# Altium PCB FelineFeastPCB.PcbDoc (part 1 of 2)
Units mm, origin at the board's own origin, x right, y up, seen from the top; angles counter-clockwise.
Board outline 55 x 55 mm, 2 copper layers (Top Layer, Bottom Layer); 81 components, 60 nets, 299 pads, 12 vias.
Unrouted connection lines stored in the file: 202.
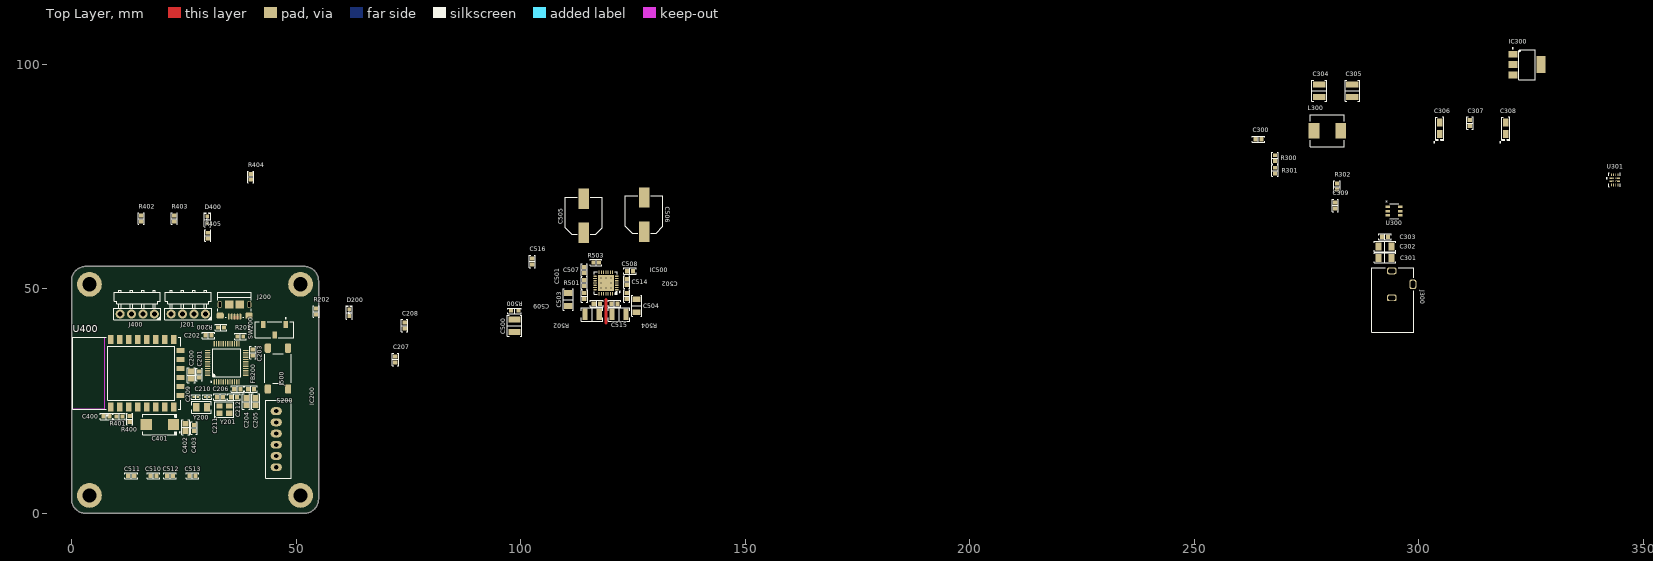
[diagram p0: Top Layer view]
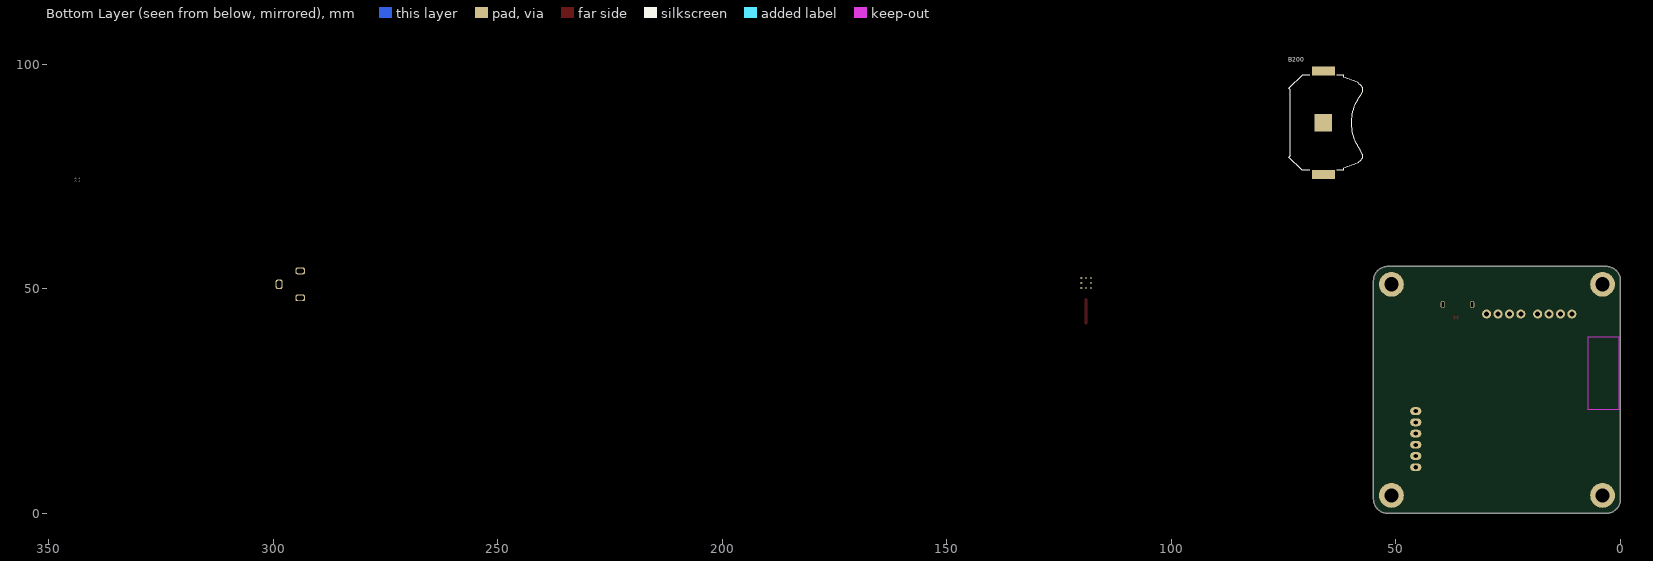
[diagram p1: Bottom Layer view, seen from below]

## Layer stack, top to bottom
Top Solder: solder mask 0.0102, Solder Resist, Dk 3.5
Top Layer: signal copper 0.0356
Dielectric 1: dielectric 0.32, FR-4, Dk 4.8
Bottom Layer: signal copper 0.0356
Bottom Solder: solder mask 0.0102, Solder Resist, Dk 3.5

## Board outline
0,3.2 0,51.8 cw(c3.2,51.8) 3.2,55 51.8,55 cw(c51.8,51.8) 55,51.8 55,3.2 cw(c51.8,3.2) 51.8,0 3.2,0 cw(c3.2,3.2)

## Design rules (kind name [scope] priority, off if disabled: settings)
Clearance [All] p1: gap=0.1 ignorepadtopadclearanceinfootprint=FALSE except(0.2: Arc-Via Track-Via; 0.35: Arc-THPad Track-THPad)
DiffPairsRouting [All] p1: maxlimit=0.254 minlimit=0.254 mostfreqgap=0.254 toplayer_minwidth=0.381 toplayer_maxwidth=0.381 toplayer_prefwidth=0.381 bottomlayer_minwidth=0.381 bottomlayer_maxwidth=0.381 bottomlayer_prefwidth=0.381 maxuncoupledlength=12.7
HoleToHoleClearance [All] p1: gap=0.2 allowstackedmicrovias=TRUE
MinimumSolderMaskSliver [All] p1: minsoldermaskwidth=0.2
PolygonConnect [All] p1: connectstyle=Relief reliefconductorwidth=0.254 reliefentries=4 polygonreliefangle="90 Angle" airgapwidth=0.254
RoutingVias [All] p1: holewidth=0.711 width=1.27 viastyle="Through Hole" minholewidth=0.15 minwidth=0.25 maxholewidth=1.5 maxwidth=3
SilkToSilkClearance [All] p1: silktosilkclearance=0.1
SilkToSolderMaskClearance [IsPad] p1: minsilkscreentomaskgap=0.1 clearancetoexposedcopper=TRUE
SolderMaskExpansion [All] p1: expansion=0 istentingtop=FALSE
SupplyNets "Schematic Supply Nets_6" [InNet('+3.3V')] p1: voltage=0.000
SupplyNets "Schematic Supply Nets_5" [InNet('+24V')] p2: voltage=0.000
SupplyNets "Schematic Supply Nets_4" [InNet('VBUS')] p3: voltage=0.000
SupplyNets "Schematic Supply Nets_3" [InNet('+3.3VA')] p4: voltage=0.000
SupplyNets "Schematic Supply Nets_2" [InNet('+VBAT')] p5: voltage=0.000
SupplyNets "Schematic Supply Nets_1" [InNet('+5V')] p6: voltage=0.000
SupplyNets "Schematic Supply Nets" [InNet('GND')] p7: voltage=0.000
Width [All] p1: maxlimit=3 minlimit=0.1 preferedwidth=0.254
25 further rules are at their usual default settings.

## Classes and differential pairs
component class U_5_StepperMotorDriver: C500 C501 C502 C503 C504 C505 C506 C507 C508 C509 C510 C511 C512 C513 C514 C515 C516 IC500 J500 R500 R501 R502 R503 R504
component class U_4_WiFi: C400 C401 C402 C403 D400 J400 R400 R401 R402 R403 R404 R405 U400
component class U_3_Power: C300 C301 C302 C303 C304 C305 C306 C307 C308 C309 IC300 J300 L300 R300 R301 R302 U300 U301
component class U_2_MCU: B200 C200 C201 C202 C203 C204 C205 C206 C207 C208 C209 C210 C211 C212 D200 FB200 IC200 J200 J201 R200 R201 R202 S200 SW200 Y200 Y201
differential pair USB: +USB_P -USB_N

## Components (designator, comment, footprint, x,y, rotation, side; value= is the part's Value field where it differs from the comment)
B200 "3034TR" "KEYSTONE 3034TR" 66.167,86.995 r270 bottom
C200 "10 µF" "CAP 0805_2012" 26.67,30.772 r90 top
C201 "0.1 µF" "CAP 0603_1608" 28.448,30.901 r270 top
C202 "0.1 µF" "CAP 0603_1608" 30.48,39.624 r180 top
C203 "0.1 µF" "CAP 0603_1608" 40.386,35.814 r90 top
C204 "1 µF" "CAP 0805_2012" 38.949,24.892 r90 top
C205 "1 µF" "CAP 0805_2012" 40.981,24.892 r90 top
C206 "10000 pF" "CAP 0603_1608" 36.917,27.686 r0 top
C207 "0.1 µF" "CAP 0603_1608" 72.136,34.29 r90 top
C208 "0.1 µF" "CAP 0603_1608" 74.168,41.822 r90 top
C209 "4.7 pF" "MURATA GJM155 0402_1005" 27.686,25.908 r0 top
C210 "4.7 pF" "MURATA GJM155 0402_1005" 30.226,25.908 r180 top
C211 "8.2 pF" "CAP 0603_1608" 33.107,25.908 r180 top
C212 "8.2 pF" "CAP 0603_1608" 36.155,25.908 r0 top
C300 "0.1 µF" "CAP 0603_1608" 264.287,83.312 r0 top
C301 "4.7 µF" "CAP 1206_3216 - 0.8MM" 292.481,56.896 r0 top
C302 "4.7 µF" "CAP 1206_3216 - 0.8MM" 292.481,59.436 r0 top
C303 "0.1 µF" "CAP 0603_1608" 292.481,61.595 r0 top
C304 "22 µF" "CAP 1210_3225 - 1MM" 277.84,94.107 r90 top
C305 "22 µF" "CAP 1210_3225 - 1MM" 285.206,94.107 r90 top
C306 "10µF" "CAP POL 1206_3216" 304.654,85.779 r90 top
C307 "0.1 µF" "CAP 0603_1608" 311.385,86.922 r90 top
C308 "10µF" "CAP POL 1206_3216" 319.386,85.779 r90 top
C309 "10000 pF" "CAP 0603_1608" 281.432,68.58 r90 top
C400 "470 pF" "CAP 0603_1608" 7.747,21.59 r0 top
C401 "100µF" "CAP POL 2917_7343" 19.685,19.812 r180 top
C402 "10 µF" "CAP 0805_2012" 25.4,19.177 r270 top
C403 "0.1 µF" "CAP 0603_1608" 27.305,19.05 r90 top
C500 "1 µF" "CAP 1210_3225 - 1MM" 98.679,41.78 r270 top
C501 "0.1 µF" "CAP 0603_1608" 114.226,48.387 r270 top
C502 "0.1 µF" "CAP 0603_1608" 123.645,48.387 r270 top
C503 "10 µF" "CAP 1206_3216 - 0.8MM" 110.617,47.625 r90 top
C504 "10 µF" "CAP 1206_3216 - 0.8MM" 125.857,46.228 r90 top
C505 "220 µF" "CAP ALSMD 8.3MM H10.5MM" 114.046,66.294 r90 top
C506 "220 µF" "CAP ALSMD 8.3MM H10.5MM" 127.508,66.548 r90 top
C507 "0.1 µF" "CAP 0603_1608" 114.173,54.229 r270 top
C508 "0.1 µF" "CAP 0603_1608" 124.345,53.975 r180 top
C509 "0.1 µF" "CAP 0603_1608" 116.967,46.736 r180 top
C510 "470 pF" "CAP 0603_1608" 18.248,8.374 r0 top
C511 "470 pF" "CAP 0603_1608" 13.295,8.374 r0 top
C512 "470 pF" "CAP 0603_1608" 21.971,8.374 r180 top
C513 "470 pF" "CAP 0603_1608" 26.924,8.374 r180 top
C514 "0.022 µF" "CAP 0603_1608" 123.645,51.562 r90 top
C515 "0.1 µF" "CAP 0603_1608" 120.904,46.736 r0 top
C516 "2.2 µF" "CAP 0603_1608" 102.616,56.134 r270 top
D200 "Yellow" "LED 0603_1608 YELLOW" 61.849,44.704 r90 top
D400 "Yellow" "LED 0603_1608 YELLOW" 30.251,65.405 r90 top
FB200 "120 Ohms @ 100 MHz" "FER 0603_1608" 39.965,27.686 r0 top
IC200 "STM32F103CBT6" "ST LQFP-48 7X7MM" 34.544,33.528 r90 top
IC300 "LD1117S33TR" "ST SOT-223" 324.104,99.949 r0 top
IC500 "TMC2209-LA-T" "TRINAMIC QFN28 TMC2209-LA" 118.999,51.308 r180 top
J200 "10118193-0001LF" "FCI USB 10118193-0001LF" 36.3,46.45 r0 top
J201 "M20-9960445" "HARWIN M20-9960445" 26,44.4 r180 top
J300 "PJ-102AH" "CUI PJ-102AH" 294.005,47.498 r180 top
J400 "M20-9960445" "HARWIN M20-9960445" 14.63,44.4 r180 top
J500 "B6B-XH-A(LF)(SN)" "JST XH B6B-XH-A" 45.593,16.53 r90 top
L300 "SL0624-6R8M" SL0624-6R8M 279.654,85.217 r0 top
R200 "1.5 kOhms" "RES 0603_1608" 33.274,41.402 r180 top
R201 "10 kOhms" "RES 0603_1608" 37.592,39.37 r180 top
R202 "820 Ohms" "RES 0603_1608" 54.483,44.958 r90 top
R300 "100 kOhms" "RES 0603_1608" 267.97,79.121 r90 top
R301 "13.7 kOhms" "RES 0603_1608" 267.97,76.327 r90 top
R302 "51.1 kOhms" "RES 0603_1608" 281.813,72.786 r90 top
R400 "10 kOhms" "RES 0603_1608" 12.954,21.02 r270 top
R401 "10 kOhms" "RES 0603_1608" 10.668,21.59 r180 top
R402 "10 kOhms" "RES 0603_1608" 15.519,65.659 r90 top
R403 "10 kOhms" "RES 0603_1608" 22.885,65.659 r90 top
R404 "10 kOhms" "RES 0603_1608" 39.903,74.93 r90 top
R405 "820 Ohms" "RES 0603_1608" 30.353,61.849 r90 top
R500 "1.1 Ohms" "YAGEO RES 0603_1608" 98.679,45.085 r0 top
R501 "100 kOhms" "RES 0603_1608" 114.173,51.308 r90 top
R502 "110 mOhms" "RES 1210_3225" 115.951,44.323 r0 top
R503 "1 kOhms" "RES 0603_1608" 116.837,55.88 r0 top
R504 "110 mOhms" "RES 1210_3225" 121.92,44.323 r180 top
S200 "FSM6JSMA" "TE FSM6JSMA" 45.974,32.258 r0 top
SW200 "JS102011JCQN" FP-JS102011JCQN-MFG 45.212,40.894 r180 top
U300 "LMR51430XDDCR" SOT-23-THIN-6_DDC_TEX 294.513,67.31 r0 top
U301 "TPS2121RUXT" FP-RUX0012A-MFG 343.626,74.295 r0 top
U400 "ESP8266-12E/ESP-12E" XCVR_ESP8266-12E/ESP-12E 15.775,31.242 r90 top
Y200 "32.768 kHz" "ABRACON ABS07" 28.956,23.622 r0 top
Y201 "16 MHz" "NDK NX3225GA" 34.036,23.114 r0 top

## Footprints (in the part's own frame and the unit in brackets; to place one, negate y for a bottom-side part, rotate by r counter-clockwise, add the part's x,y. Pads: shape width x height; smd on the part's side, far side on the other; paste and mask are expansions set on the pad)
"ABRACON ABS07" [mm] "Crystal, 2-Leads, Body 3.20x1.50mm, IPC Medium Density"
  rect 1.4x1.9 smd: 1(-1.2,0) 2(1.2,0)
  silkscreen extent -2.2,-1.3 2.2,1.3, body extent -1.62,-0.77 1.63,0.78, height 0.9
"CAP 0603_1608" [mm] "Chip Capacitor, 2-Leads, Body 1.60x0.80mm, IPC Medium Density"
  rect 0.9x1 smd: 1(-0.675,0) 2(0.675,0)
  silkscreen extent -1.4,-0.7 1.4,0.7, body extent -0.8,-0.41 0.8,0.41, height 0.82
"CAP 0805_2012" [mm] "Chip Capacitor, 2-Leads, Body 2.00x1.20mm, IPC Medium Density"
  rect 1.3x1.4 smd: 1(-0.8,0) 2(0.8,0)
  silkscreen extent -1.7,-0.9 1.7,0.9, body extent -1,-0.64 1,0.64, height 1.26
"CAP 1206_3216 - 0.8MM" [mm] "Chip Capacitor, 2-Leads, Body 3.25x1.60mm, IPC Medium Density"
  rect 1.3x1.8 smd: 1(-1.45,0) 2(1.45,0)
  silkscreen extent -2.37,-1.12 2.37,1.12, body extent -1.6,-0.8 1.6,0.8, height 0.8
"CAP 1210_3225 - 1MM" [mm] "Chip Capacitor, 2-Leads, Body 3.20x2.50mm, IPC Medium Density"
  rect 1.3x2.7 smd: 1(-1.4,0) 2(1.4,0)
  silkscreen extent -2.37,-1.63 2.37,1.63, body extent -1.6,-1.25 1.6,1.25, height 1
"CAP ALSMD 8.3MM H10.5MM" [mm] "Aluminum Electrolytic Capacitor, Body 8.30x8.30x10.50mm, IPC Low Density"
  rect 4.55x2.3 smd: 1(-3.8,0) 2(3.8,0)
  silkscreen extent -4.15,-4.15 4.15,4.15, body extent -4.95,-4.15 4.95,4.15, height 10.5
"CAP POL 1206_3216" [mm] "Molded Capacitor, 2-Leads, Body 3.20x1.6mm, IPC Medium Density"
  rect 1.8x1.23 smd: 1(-1.31,0) 2(1.31,0)
  silkscreen extent -3.22,-0.9 2.5,1.32, body extent -1.72,-0.85 1.71,0.85, height 1.7
"CAP POL 2917_7343" [mm] "Molded Capacitor, 2-Leads, Body 7.30x4.30mm, IPC Medium Density"
  rect 2.55x2.45 smd: 1(-3.025,0) 2(3.025,0)
  silkscreen extent -4.58,-2.3 3.8,2.3, body extent -3.65,-2.15 3.65,2.15, height 4.1
"CUI PJ-102AH" [mm] "DC Barrel Jack W/ Switch 2.0x5.5"
  rrect50% 2.1x1.5 hole 1 slot 1.6 at 0 deg: 1(0,-6.5) 2(0,-0.5)
  rrect50% 1.5x2.1 hole 1 slot 1.6 at 90 deg: 3(-4.7,-3.5)
  silkscreen extent -4.92,-7.2 4.47,7.2, body extent -4.92,-7.2 4.47,7.2, height 11
"FCI USB 10118193-0001LF" [mm] "USB 2.0 Type B Micro"
  oval 0.4x1.35 smd: 1(1.3,-2.625) 2(0.65,-2.625) 3(0,-2.625) 4(-0.65,-2.625) 5(-1.3,-2.625)
  oval 0.9x1.6 hole 0.5 slot 1.2 at 90 deg: S(-3.3,0.05) S(3.3,0.05)
  rrect50% 1.6x1.4 smd: S(-3.2,-2.4) S(3.2,-2.4)
  rect 1.9x1.8 smd: S(-1.2,0.05) S(1.2,0.05)
  silkscreen extent -3.7,-2.8 3.7,2.8, body extent -3.93,-2.9 3.93,2.76, height 2.78
"FER 0603_1608" [mm] "Chip Ferrite, 2-Leads, Body 1.60x0.80mm, IPC Medium Density"
  rect 0.9x1 smd: 1(-0.675,0) 2(0.675,0)
  silkscreen extent -1.4,-0.7 1.4,0.7, body extent -0.8,-0.41 0.8,0.41, height 0.82
FP-JS102011JCQN-MFG [mm]
  rect 1x1.6 smd paste+0 mask+0: 1(-2.5,-1.2) 2(0,1.2) 3(2.5,-1.2)
  silkscreen extent -4.25,-2.67 4.25,1.8, body extent -4.35,-2.1 4.35,2.1, height 0.25
FP-RUX0012A-MFG [mm]
  rrect25% 1.05x0.4 smd paste+0 mask+0: 1(-0.675,0.35) 2(-0.675,-0.35) 7(0.675,-0.35) 8(0.675,0.35)
  rrect50% 0.2x0.6 smd paste+0 mask+0: 3(-0.75,-1.15) 4(-0.25,-1.15) 5(0.25,-1.15) 6(0.75,-1.15) 9(0.75,1.15) 10(0.25,1.15) 11(-0.25,1.15) 12(-0.75,1.15)
  silkscreen extent -1.87,-1.55 1.3,1.55, body extent -1.3,-1.55 1.3,1.55, height 0.25
"HARWIN M20-9960445" [mm] "2.54mm DIL PC TAIL PIN HEADER ASSEMBLY"
  round 2 hole 1.1: 1(-3.81,0) 2(-1.27,0) 3(1.27,0) 4(3.81,0)
  silkscreen extent -5.24,-5.33 5.24,1.3, body extent -5.08,-10.9 5.08,0.32, height 2.54
"JST XH B6B-XH-A" [mm]
  oval 1.75x2.5 hole 0.9: 1(-6.25,0) 2(-3.75,0) 3(-1.25,0) 4(1.25,0) 5(3.75,0) 6(6.25,0)
  silkscreen extent -8.7,-3.38 8.7,2.38, body extent -8.7,-3.38 8.7,2.38, height 7
"KEYSTONE 3034TR" [mm] "Battery Retainer Coin, 20.0mm 1 Cell SMD (SMT) Tab"
  rect 2x5.08 smd: 1(-11.5,0) 1(11.5,0)
  rect 3.96x3.96 smd: 2(0,0)
  silkscreen extent -10.6,-7.7 10.6,8.71, body extent -11.62,-7.74 11.62,8.73, height 4.06
"LED 0603_1608 YELLOW" [mm] "Chip Diode, 2-Leads, Body 1.60x0.80mm, IPC Medium Density"
  rect 0.8x0.8 smd: 1(-0.75,0) 2(0.75,0)
  silkscreen extent -1.52,-0.7 1.52,0.7, body extent -0.8,-0.4 0.8,0.4, height 0.53
"MURATA GJM155 0402_1005" [mm] "Chip Capacitor, 2-Leads, Body 1.0x0.50mm"
  rect 0.55x0.5 smd: 1(-0.475,0) 2(0.475,0)
  silkscreen extent -1,-0.5 1,0.5, body extent -0.52,-0.27 0.53,0.28, height 0.55
"NDK NX3225GA" [mm] "Crystal, 4-Leads, Body 2.50x3.20mm, Pitch 2.20mm, IPC Medium Density"
  rect 1.4x1.2 smd: 1(-1.1,-0.8) 2(1.1,-0.8) 3(1.1,0.8) 4(-1.1,0.8)
  silkscreen extent -2.25,-1.85 2.1,1.7, body extent -1.61,-1.26 1.61,1.26, height 0.75
"RES 0603_1608" [mm] "Chip Resistor, 2-Leads, Body 1.60x0.80mm, IPC Medium Density"
  rect 0.85x0.95 smd: 1(-0.65,0) 2(0.65,0)
  silkscreen extent -1.27,-0.7 1.27,0.7, body extent -0.8,-0.4 0.8,0.4, height 0.45
"RES 1210_3225" [mm] "Chip Resistor, 2-Leads, Body 3.1x2.6mm, IPC Medium Density"
  rect 1.15x2.5 smd: 1(-1.575,0) 2(1.575,0)
  silkscreen extent -2.4,-1.5 2.4,1.5, body extent -1.6,-1.25 1.6,1.25, height 0.7
SL0624-6R8M [mm] "Precision Wire Wound Inductor, 2-Leads, Body 7,10x6,60mm, IPC Medium Density"
  rect 2.4x3.5 smd: 1(-3,0) 2(3,0)
  silkscreen extent -3.8,-3.55 3.8,3.55, body extent -3.8,-3.55 3.8,3.55, height 2.4
SOT-23-THIN-6_DDC_TEX [mm]
  rect 0.998x0.558 smd paste+0 mask+0: 1(-1.375,0.95) 2(-1.375,0) 3(-1.375,-0.95) 4(1.375,-0.95) 5(1.375,0) 6(1.375,0.95)
  silkscreen extent -1,-1.65 1,1.65, body extent -1.52,-1.52 1.52,1.52, height 1.09
"ST LQFP-48 7X7MM" [mm] "LQFP, 48-Leads, Body 7.00x7.00mm, Pitch 0.50mm, IPC Medium Density"
  oval 1.2x0.3 smd: 1(-4.25,2.75) 2(-4.25,2.25) 3(-4.25,1.75) 4(-4.25,1.25) 5(-4.25,0.75) 6(-4.25,0.25) 7(-4.25,-0.25) 8(-4.25,-0.75) 9(-4.25,-1.25) 10(-4.25,-1.75) 11(-4.25,-2.25) 12(-4.25,-2.75) 25(4.25,-2.75) 26(4.25,-2.25) 27(4.25,-1.75) 28(4.25,-1.25) 29(4.25,-0.75) 30(4.25,-0.25) 31(4.25,0.25) 32(4.25,0.75) 33(4.25,1.25) 34(4.25,1.75) 35(4.25,2.25) 36(4.25,2.75)
  oval 0.3x1.2 smd: 13(-2.75,-4.25) 14(-2.25,-4.25) 15(-1.75,-4.25) 16(-1.25,-4.25) 17(-0.75,-4.25) 18(-0.25,-4.25) 19(0.25,-4.25) 20(0.75,-4.25) 21(1.25,-4.25) 22(1.75,-4.25) 23(2.25,-4.25) 24(2.75,-4.25) 37(2.75,4.25) 38(2.25,4.25) 39(1.75,4.25) 40(1.25,4.25) 41(0.75,4.25) 42(0.25,4.25) 43(-0.25,4.25) 44(-0.75,4.25) 45(-1.25,4.25) 46(-1.75,4.25) 47(-2.25,4.25) 48(-2.75,4.25)
  silkscreen extent -4.37,-3.1 3.1,3.57, body extent -4.51,-4.51 4.51,4.51, height 1.55
"ST SOT-223" [mm] "SOT223, 4-Leads, Body 6.50x7.00mm (avg), Pitch 2.30mm, IPC Medium Density"
  rect 2x1.5 smd: 1(-3.15,2.3) 2(-3.15,0) 3(-3.15,-2.3)
  rect 2x3.8 smd: 4(3.15,0)
  silkscreen extent -3.27,-3.35 1.85,3.72, body extent -3.52,-3.25 3.5,3.25, height 1.8
"TE FSM6JSMA" [mm]
  rrect50% 1.4x2.1 smd: 1(2.25,4.55) 2(2.25,-4.55) 3(-2.25,4.55) 4(-2.25,-4.55)
  silkscreen extent -2.92,-3.3 2.92,3.3, body extent -3,-5 3,5, height 7.11
"TRINAMIC QFN28 TMC2209-LA" [mm] "QFN, 28-Leads, Body 5.00x5.00mm, Pitch 0.50mm, Thermal Pad 3.70x3.70mm, IPC Medium Density"
  oval 0.8x0.25 smd: 1(-2.425,1.5) 2(-2.425,1) 3(-2.425,0.5) 4(-2.425,0) 5(-2.425,-0.5) 6(-2.425,-1) 7(-2.425,-1.5) 15(2.425,-1.5) 16(2.425,-1) 17(2.425,-0.5) 18(2.425,0) 19(2.425,0.5) 20(2.425,1) 21(2.425,1.5)
  oval 0.25x0.8 smd: 8(-1.5,-2.425) 9(-1,-2.425) 10(-0.5,-2.425) 11(0,-2.425) 12(0.5,-2.425) 13(1,-2.425) 14(1.5,-2.425) 22(1.5,2.425) 23(1,2.425) 24(0.5,2.425) 25(0,2.425) 26(-0.5,2.425) 27(-1,2.425) 28(-1.5,2.425)
  rect 3.6x3.6 smd paste-2 mask+0.102: 29(0,0)
  silkscreen extent -3.22,-2.55 2.55,2.55, body extent -2.5,-2.5 2.5,2.5, height 0.9
XCVR_ESP8266-12E/ESP-12E [mm]
  rect 2x1.2 smd: 1(-7.5,7) 2(-7.5,5) 3(-7.5,3) 4(-7.5,1) 5(-7.5,-1) 6(-7.5,-3) 7(-7.5,-5) 8(-7.5,-7) 15(7.5,-7) 16(7.5,-5) 17(7.5,-3) 18(7.5,-1) 19(7.5,1) 20(7.5,3) 21(7.5,5) 22(7.5,7)
  rect 1.1x1.7 smd: 9(-5,-8.5) 10(-3,-8.5) 11(-1,-8.5) 12(1,-8.5) 13(3,-8.5) 14(5,-8.5)
  Keep-Out Layer region: 8,8.51 -8.009,8.51 -8.009,15.5 8,15.5
  Keep-Out Layer region: 8,8.51 -8.009,8.51 -8.009,15.5 8,15.5
  silkscreen extent -9.5,-8.5 8,15.5, body extent -8,-8.49 8,15.51, height 3
"YAGEO RES 0603_1608" [mm] "Chip Resistor, 2-Leads, Body 1.60x0.80mm"
  rect 0.9x0.8 smd: 1(-0.85,0) 2(0.85,0)
  silkscreen extent -1.5,-0.6 1.5,0.6, body extent -0.8,-0.4 0.8,0.4, height 0.45

## Part data
B200: "BATTERY RETAINER COIN 20MM SMD", Manufacturer="Keystone Electronics", Supplier Part Number 1=36-3034CT-ND, Battery Cell Size="Coin, 20.0mm", Battery Series="2020, 2025, 2032", Battery Type, Function="Coin Cell, Retainer", ComponentLink1Description=Datasheet, ComponentLink1URL=http://keyelco.com/userAssets/file/M65p9.pdf, ComponentLink2Description="DigiKey Link", ComponentLink2URL=https://www.digikey.com/en/products/detail/keystone-electronics/3034TR/4499408, Height Above Board="0.160\" (4.06mm)", LastUpdated="29.08.2025 3:23:39", Lifecycle Status=Active, Minimum Order=1, Mounting Type="PCB, Surface Mount", Number of Cells=1, Packaging=TapeAndReel, Part Number=3034TR, Part Status=Active, PartId=8, Price=0.20, Series=-, Style=Retainer, Supplier 1=DigiKey, Termination Style="SMD (SMT) Tab"
C200 C402: library part CL21B106KPQNNNE, "CAP CER 10UF 10V X7R 0805", Device Package="0805 (2012 Metric)", Manufacturer="Samsung Electro-Mechanics", Operating Temperature="-55°C ~ 125°C", Supplier Part Number 1=1276-1764-1-ND, Temperature Coefficient=X7R, Tolerance=±10%, Voltage - Rated=10V, Applications="General Purpose", Capacitance="10 µF", ComponentLink1Description=Datasheet, ComponentLink1URL=http://www.samsungsem.com/kr/support/product-search/mlcc/CL21B106KPQNNNE.jsp, ComponentLink2Description="DigiKey Link", ComponentLink2URL=https://www.digikey.com/en/products/detail/samsung-electro-mechanics/CL21B106KPQNNNE/3887422, LastUpdated="09.02.2024 20:15:41", Lifecycle Status=Active, Minimum Order=1, Mounting Type="Surface Mount, MLCC", Package / Case="0805 (2012 Metric)", Packaging=TapeAndReel, Part Number=CL21B106KPQNNNE, Part Status=Active, PartId=13130, Price=0.02, Series=CL, Size / Dimension="0.079\" L x 0.049\" W (2.00mm x 1.25mm)", Supplier 1=DigiKey, Thickness (Max)="0.055\" (1.40mm)"
C201 C202 C203 C207 C208 C300 C307 C403: library part CL10B104KA8NNNC, "CAP CER 0.1UF 25V X7R 0603", Device Package="0603 (1608 Metric)", Manufacturer="Samsung Electro-Mechanics", Operating Temperature="-55°C ~ 125°C", Supplier Part Number 1=1276-1006-1-ND, Temperature Coefficient=X7R, Tolerance=±10%, Voltage - Rated=25V, Applications="General Purpose", Capacitance="0.1 µF", ComponentLink1Description=Datasheet, ComponentLink1URL=http://www.samsungsem.com/kr/support/product-search/mlcc/CL10B104KA8NNNC.jsp, ComponentLink2Description="DigiKey Link", ComponentLink2URL=https://www.digikey.com/en/products/detail/samsung-electro-mechanics/CL10B104KA8NNNC/3886664, LastUpdated="09.02.2024 20:10:20", Lifecycle Status=Active, Minimum Order=1, Mounting Type="Surface Mount, MLCC", Package / Case="0603 (1608 Metric)", Packaging=TapeAndReel, Part Number=CL10B104KA8NNNC, Part Status=Active, PartId=9793, Price=0.01, Series=CL, Size / Dimension="0.063\" L x 0.031\" W (1.60mm x 0.80mm)", Supplier 1=DigiKey, Thickness (Max)="0.035\" (0.90mm)"
C204 C205: library part CL21B105KAFNFNE, "CAP CER 1UF 25V X7R 0805", Device Package="0805 (2012 Metric)", Manufacturer="Samsung Electro-Mechanics", Operating Temperature="-55°C ~ 125°C", Supplier Part Number 1=1276-2926-1-ND, Temperature Coefficient=X7R, Tolerance=±10%, Voltage - Rated=25V, Applications="General Purpose", Capacitance="1 µF", ComponentLink1Description=Datasheet, ComponentLink1URL=http://www.samsungsem.com/kr/support/product-search/mlcc/CL21B105KAFNFNE.jsp, ComponentLink2Description="DigiKey Link", ComponentLink2URL=https://www.digikey.com/en/products/detail/samsung-electro-mechanics/CL21B105KAFNFNE/3888584, LastUpdated="09.02.2024 20:16:02", Lifecycle Status=Active, Minimum Order=1, Mounting Type="Surface Mount, MLCC", Package / Case="0805 (2012 Metric)", Packaging=TapeAndReel, Part Number=CL21B105KAFNFNE, Part Status=Active, PartId=4875, Price=0.01, Series=CL, Size / Dimension="0.079\" L x 0.049\" W (2.00mm x 1.25mm)", Supplier 1=DigiKey, Thickness (Max)="0.053\" (1.35mm)"
C206: library part CL10B103KB8NNNC, "CAP CER 10000PF 50V X7R 0603", Capacitance="10 nF", Device Package="0603 (1608 Metric)", Manufacturer="Samsung Electro-Mechanics", Operating Temperature="-55°C ~ 125°C", Supplier Part Number 1=1276-1009-1-ND, Temperature Coefficient=X7R, Tolerance=±10%, Voltage - Rated=50V, Applications="General Purpose", ComponentLink1Description=Datasheet, ComponentLink1URL=http://www.samsungsem.com/kr/support/product-search/mlcc/CL10B103KB8NNNC.jsp, ComponentLink2Description="DigiKey Link", ComponentLink2URL=https://www.digikey.com/en/products/detail/samsung-electro-mechanics/CL10B103KB8NNNC/3886667, LastUpdated="09.02.2024 20:10:26", Lifecycle Status=Active, Minimum Order=1, Mounting Type="Surface Mount, MLCC", Package / Case="0603 (1608 Metric)", Packaging=TapeAndReel, Part Number=CL10B103KB8NNNC, Part Status=Active, PartId=5498, Price=0.01, Series=CL, Size / Dimension="0.063\" L x 0.031\" W (1.60mm x 0.80mm)", Supplier 1=DigiKey, Thickness (Max)="0.035\" (0.90mm)"
C209 C210: library part GJM1555C1H4R7GB01D, "CAP CER 4.7PF 50V C0G/NP0 0402", Device Package="0402 (1005 Metric)", Manufacturer="Murata Electronics", Operating Temperature="-55°C ~ 125°C", Supplier Part Number 1=490-GJM1555C1H4R7GB01DCT-ND, Temperature Coefficient="C0G, NP0", Tolerance=±2%, Voltage - Rated=50V, Applications="RF, Microwave, High Frequency", Capacitance="4.7 pF", ComponentLink1Description=Datasheet, ComponentLink1URL=https://search.murata.co.jp/Ceramy/image/img/A01X/G101/ENG/GJM1555C1H4R7GB01-01A.pdf, ComponentLink2Description="DigiKey Link", ComponentLink2URL=https://www.digikey.com/en/products/detail/murata-electronics/GJM1555C1H4R7GB01D/16033620, Features="High Q, Low Loss", LastUpdated="20.07.2024 0:08:42", Lifecycle Status=Active, Minimum Order=1, Mounting Type="Surface Mount, MLCC", Package / Case="0402 (1005 Metric)", Packaging=TapeAndReel, Part Number=GJM1555C1H4R7GB01D, PartId=55648, Price=0.01, Series=GJM, Size / Dimension="0.039\" L x 0.020\" W (1.00mm x 0.50mm)", Supplier 1=DigiKey, Thickness (Max)="0.022\" (0.55mm)"
C211 C212: library part CC0603JRNPO9BN8R2, "CAP CER 8.2PF 50V C0G/NPO 0603", Device Package="0603 (1608 Metric)", Manufacturer=Yageo, Operating Temperature="-55°C ~ 125°C", Supplier Part Number 1=311-3977-1-ND, Temperature Coefficient="C0G, NP0", Tolerance=±5%, Voltage - Rated=50V, Applications="General Purpose", Capacitance="8.2 pF", ComponentLink1Description=Datasheet, ComponentLink1URL=https://www.yageo.com/upload/media/product/productsearch/datasheet/mlcc/UPY-GP_NP0_16V-to-50V_17.pdf, ComponentLink2Description="DigiKey Link", ComponentLink2URL=https://www.digikey.com/en/products/detail/yageo/CC0603JRNPO9BN8R2/5883626, LastUpdated="09.02.2024 20:10:11", Lifecycle Status=Active, Minimum Order=1, Mounting Type="Surface Mount, MLCC", Package / Case="0603 (1608 Metric)", Packaging=TapeAndReel, Part Number=CC0603JRNPO9BN8R2, Part Status=Active, PartId=15511, Price=0.01, Series=CC, Size / Dimension="0.063\" L x 0.031\" W (1.60mm x 0.80mm)", Supplier 1=DigiKey, Thickness (Max)="0.035\" (0.90mm)"
C301 C302: library part CL31B475KBHNNNE, "CAP CER 4.7UF 50V X7R 1206", Device Package="1206 (3216 Metric)", Manufacturer="Samsung Electro-Mechanics", Operating Temperature="-55°C ~ 125°C", Supplier Part Number 1=1276-2789-1-ND, Temperature Coefficient=X7R, Tolerance=±10%, Voltage - Rated=50V, Applications="General Purpose", Capacitance="4.7 µF", ComponentLink1Description=Datasheet, ComponentLink1URL=http://www.samsungsem.com/kr/support/product-search/mlcc/CL31B475KBHNNNE.jsp, ComponentLink2Description="DigiKey Link", ComponentLink2URL=https://www.digikey.com/en/products/detail/samsung-electro-mechanics/CL31B475KBHNNNE/3888447, LastUpdated="04.06.2024 19:10:40", Lifecycle Status=Active, Minimum Order=1, Mounting Type="Surface Mount, MLCC", Package / Case="1206 (3216 Metric)", Packaging=TapeAndReel, Part Number=CL31B475KBHNNNE, Part Status=Active, PartId=40975, Price=0.05, Series=CL, Size / Dimension="0.126\" L x 0.063\" W (3.20mm x 1.60mm)", Supplier 1=DigiKey, Thickness (Max)="0.071\" (1.80mm)"
C303 C501 C502 C507 C508 C509 C515: library part CL10B104KB8NNNC, "CAP CER 0.1UF 50V X7R 0603", Device Package="0603 (1608 Metric)", Manufacturer="Samsung Electro-Mechanics", Operating Temperature="-55°C ~ 125°C", Supplier Part Number 1=1276-1000-1-ND, Temperature Coefficient=X7R, Tolerance=±10%, Voltage - Rated=50V, Applications="General Purpose", Capacitance="0.1 µF", ComponentLink1Description=Datasheet, ComponentLink1URL=http://www.samsungsem.com/kr/support/product-search/mlcc/CL10B104KB8NNNC.jsp, ComponentLink2Description="DigiKey Link", ComponentLink2URL=https://www.digikey.com/en/products/detail/samsung-electro-mechanics/CL10B104KB8NNNC/3886658, LastUpdated="09.02.2024 20:10:20", Lifecycle Status=Active, Minimum Order=1, Mounting Type="Surface Mount, MLCC", Package / Case="0603 (1608 Metric)", Packaging=TapeAndReel, Part Number=CL10B104KB8NNNC, Part Status=Active, PartId=9788, Price=0.01, Series=CL, Size / Dimension="0.063\" L x 0.031\" W (1.60mm x 0.80mm)", Supplier 1=DigiKey, Thickness (Max)="0.035\" (0.90mm)"
C304 C305: library part CL32B226KAJNNNE, "CAP CER 22UF 25V X7R 1210", Device Package="1210 (3225 Metric)", Manufacturer="Samsung Electro-Mechanics", Operating Temperature="-55°C ~ 125°C", Supplier Part Number 1=1276-3392-1-ND, Temperature Coefficient=X7R, Tolerance=±10%, Voltage - Rated=25V, Applications="General Purpose", Capacitance="22 µF", ComponentLink1Description=Datasheet, ComponentLink1URL=http://www.samsungsem.com/kr/support/product-search/mlcc/CL32B226KAJNNNE.jsp, ComponentLink2Description="DigiKey Link", ComponentLink2URL=https://www.digikey.com/en/products/detail/samsung-electro-mechanics/CL32B226KAJNNNE/3889050, LastUpdated="04.06.2024 19:21:03", Lifecycle Status=Active, Minimum Order=1, Mounting Type="Surface Mount, MLCC", Package / Case="1210 (3225 Metric)", Packaging=TapeAndReel, Part Number=CL32B226KAJNNNE, Part Status=Active, PartId=39957, Price=0.13, Series=CL, Size / Dimension="0.126\" L x 0.098\" W (3.20mm x 2.50mm)", Supplier 1=DigiKey, Thickness (Max)="0.106\" (2.70mm)"
C306 C308: library part TAJA106K016RNJ, "CAP TANT 10UF 10% 16V 1206", Device Package="1206 (3216 Metric)", ESR (Equivalent Series Resistance)=3Ohm, Manufacturer="AVX Corporation", Manufacturer Size Code=A, Operating Temperature="-55°C ~ 125°C", Supplier Part Number 1=478-1655-1-ND, Tolerance=±10%, Voltage - Rated=16V, Capacitance=10µF, ComponentLink1Description=Datasheet, ComponentLink1URL=http://datasheets.avx.com/TAJ.pdf, ComponentLink2Description="DigiKey Link", ComponentLink2URL=http://digikey.com/product-detail/en/avx-corporation/TAJA106K016RNJ/478-1655-1-ND/564687, Features="General Purpose", Height - Seated (Max)="0.071\" (1.80mm)", LastUpdated="02.09.2020 1:15:58", Lifecycle Status=Active, Minimum Order=1, Mounting Type="Surface Mount", Package / Case="1206 (3216 Metric)", Packaging=TapeAndReel, Part Number=TAJA106K016RNJ, Part Status=Active, PartId=412, Price=0.10, Series=TAJ, Size / Dimension="0.126\" L x 0.063\" W (3.20mm x 1.60mm)", Supplier 1=DigiKey, Type=Molded
C309: library part CL10B103KB8NNNC, "CAP CER 10000PF 50V X7R 0603", Device Package="0603 (1608 Metric)", Manufacturer="Samsung Electro-Mechanics", Operating Temperature="-55°C ~ 125°C", Supplier Part Number 1=1276-1009-1-ND, Temperature Coefficient=X7R, Tolerance=±10%, Voltage - Rated=50V, Applications="General Purpose", Capacitance="10000 pF", ComponentLink1Description=Datasheet, ComponentLink1URL=http://www.samsungsem.com/kr/support/product-search/mlcc/CL10B103KB8NNNC.jsp, ComponentLink2Description="DigiKey Link", ComponentLink2URL=https://www.digikey.com/en/products/detail/samsung-electro-mechanics/CL10B103KB8NNNC/3886667, LastUpdated="09.02.2024 20:10:26", Lifecycle Status=Active, Minimum Order=1, Mounting Type="Surface Mount, MLCC", Package / Case="0603 (1608 Metric)", Packaging=TapeAndReel, Part Number=CL10B103KB8NNNC, Part Status=Active, PartId=5498, Price=0.01, Series=CL, Size / Dimension="0.063\" L x 0.031\" W (1.60mm x 0.80mm)", Supplier 1=DigiKey, Thickness (Max)="0.035\" (0.90mm)"
C400: library part CL10B471KB8NNNC, "CAP CER 470PF 50V X7R 0603", Device Package="0603 (1608 Metric)", Manufacturer="Samsung Electro-Mechanics", Operating Temperature="-55°C ~ 125°C", Supplier Part Number 1=1276-1094-1-ND, Temperature Coefficient=X7R, Tolerance=±10%, Voltage - Rated=50V, Applications="General Purpose", Capacitance="470 pF", ComponentLink1Description=Datasheet, ComponentLink1URL=http://www.samsungsem.com/kr/support/product-search/mlcc/CL10B471KB8NNNC.jsp, ComponentLink2Description="DigiKey Link", ComponentLink2URL=https://www.digikey.com/en/products/detail/samsung-electro-mechanics/CL10B471KB8NNNC/3886752, LastUpdated="09.02.2024 20:10:20", Lifecycle Status=Active, Minimum Order=1, Mounting Type="Surface Mount, MLCC", Package / Case="0603 (1608 Metric)", Packaging=TapeAndReel, Part Number=CL10B471KB8NNNC, Part Status=Active, PartId=9822, Price=0.01, Series=CL, Size / Dimension="0.063\" L x 0.031\" W (1.60mm x 0.80mm)", Supplier 1=DigiKey, Thickness (Max)="0.035\" (0.90mm)"
C401: library part TAJD107K016RNJ, "CAP TANT 100UF 10% 16V 2917", Device Package="2917 (7343 Metric)", ESR (Equivalent Series Resistance)=600mOhm, Manufacturer="AVX Corporation", Manufacturer Size Code=D, Operating Temperature="-55°C ~ 125°C", Supplier Part Number 1=478-1723-1-ND, Tolerance=±10%, Voltage - Rated=16V, Capacitance=100µF, ComponentLink1Description=Datasheet, ComponentLink1URL=http://datasheets.avx.com/TAJ.pdf, ComponentLink2Description="DigiKey Link", ComponentLink2URL=http://digikey.com/product-detail/en/avx-corporation/TAJD107K016RNJ/478-1723-1-ND/564755, Features="General Purpose", Height - Seated (Max)="0.122\" (3.10mm)", LastUpdated="02.09.2020 1:16:19", Lifecycle Status=Active, Minimum Order=1, Mounting Type="Surface Mount", Package / Case="2917 (7343 Metric)", Packaging=TapeAndReel, Part Number=TAJD107K016RNJ, Part Status=Active, PartId=1445, Price=0.35, Series=TAJ, Size / Dimension="0.287\" L x 0.169\" W (7.30mm x 4.30mm)", Supplier 1=DigiKey, Type=Molded
C500: library part CL32B105KBHNNNE, "CAP CER 1UF 50V X7R 1210", Device Package="1210 (3225 Metric)", Manufacturer="Samsung Electro-Mechanics", Operating Temperature="-55°C ~ 125°C", Supplier Part Number 1=1276-1811-1-ND, Temperature Coefficient=X7R, Tolerance=±10%, Voltage - Rated=50V, Applications="General Purpose", Capacitance="1 µF", ComponentLink1Description=Datasheet, ComponentLink1URL=http://www.samsungsem.com/kr/support/product-search/mlcc/CL32B105KBHNNNE.jsp, ComponentLink2Description="DigiKey Link", ComponentLink2URL=https://www.digikey.com/en/products/detail/samsung-electro-mechanics/CL32B105KBHNNNE/3887469, LastUpdated="04.06.2024 19:21:02", Lifecycle Status=Active, Minimum Order=1, Mounting Type="Surface Mount, MLCC", Package / Case="1210 (3225 Metric)", Packaging=TapeAndReel, Part Number=CL32B105KBHNNNE, Part Status=Active, PartId=24761, Price=0.03, Series=CL, Size / Dimension="0.126\" L x 0.098\" W (3.20mm x 2.50mm)", Supplier 1=DigiKey, Thickness (Max)="0.071\" (1.80mm)"
C503 C504: library part CL31B106KBHNNNE, "CAP CER 10UF 50V X7R 1206", Device Package="1206 (3216 Metric)", Manufacturer="Samsung Electro-Mechanics", Operating Temperature="-55°C ~ 125°C", Supplier Part Number 1=1276-6767-1-ND, Temperature Coefficient=X7R, Tolerance=±10%, Voltage - Rated=50V, Applications="General Purpose", Capacitance="10 µF", ComponentLink1Description=Datasheet, ComponentLink1URL=http://www.samsungsem.com/kr/support/product-search/mlcc/CL31B106KBHNNNE.jsp, ComponentLink2Description="DigiKey Link", ComponentLink2URL=https://www.digikey.com/en/products/detail/samsung-electro-mechanics/CL31B106KBHNNNE/5961251, LastUpdated="04.06.2024 19:10:41", Lifecycle Status=Active, Minimum Order=1, Mounting Type="Surface Mount, MLCC", Package / Case="1206 (3216 Metric)", Packaging=TapeAndReel, Part Number=CL31B106KBHNNNE, Part Status=Active, PartId=40563, Price=0.06, Series=CL, Size / Dimension="0.126\" L x 0.063\" W (3.20mm x 1.60mm)", Supplier 1=DigiKey, Thickness (Max)="0.071\" (1.80mm)"
C505 C506: library part EEE-FT1H221GP, "CAP ALUM 220UF 20% 50V SMD", Device Package="Radial, Can - SMD", ESR (Equivalent Series Resistance)="180mOhm @ 100kHz", Lifetime @ Temp.="5000 Hrs @ 105°C", Manufacturer="Panasonic Electronic Components", Operating Temperature="-55°C ~ 105°C", Ratings=AEC-Q200, Ripple Current @ High Frequency="670 mA @ 100 kHz", Ripple Current @ Low Frequency="435.5 mA @ 120 Hz", Supplier Part Number 1=PCE5120CT-ND, Tolerance=±20%, Voltage - Rated="50 V", Applications=Automotive, Capacitance="220 µF", ComponentLink1Description=Datasheet, ComponentLink1URL=https://na.industrial.panasonic.com/file-download/3112, ComponentLink2Description="DigiKey Link", ComponentLink2URL=https://www.digikey.com/en/products/detail/panasonic-electronic-components/EEE-FT1H221GP/6048908, Height - Seated (Max)="0.413\" (10.50mm)", LastUpdated="03.06.2024 20:15:48", Lifecycle Status=Active, Minimum Order=1, Mounting Type="Surface Mount", Package / Case="Radial, Can - SMD", Packaging=TapeAndReel, Part Number=EEE-FT1H221GP, Part Status=Active, PartId=7501, Polarization=Polar, Price=0.33, Series=FT, Size / Dimension="0.315\" Dia (8.00mm)", Supplier 1=DigiKey, Surface Mount Land Size="0.327\" L x 0.327\" W (8.30mm x 8.30mm)"
C510 C511 C512 C513: library part CL10C471JB8NNNC, "CAP CER 470PF 50V C0G/NP0 0603", Device Package="0603 (1608 Metric)", Manufacturer="Samsung Electro-Mechanics", Operating Temperature="-55°C ~ 125°C", Supplier Part Number 1=1276-1168-1-ND, Temperature Coefficient="C0G, NP0", Tolerance=±5%, Voltage - Rated=50V, Applications="General Purpose", Capacitance="470 pF", ComponentLink1Description=Datasheet, ComponentLink1URL=http://www.samsungsem.com/kr/support/product-search/mlcc/CL10C471JB8NNNC.jsp, ComponentLink2Description="DigiKey Link", ComponentLink2URL=https://www.digikey.com/en/products/detail/samsung-electro-mechanics/CL10C471JB8NNNC/3886826, LastUpdated="09.02.2024 20:10:27", Lifecycle Status=Active, Minimum Order=1, Mounting Type="Surface Mount, MLCC", Package / Case="0603 (1608 Metric)", Packaging=TapeAndReel, Part Number=CL10C471JB8NNNC, Part Status=Active, PartId=5135, Price=0.01, Series=CL, Size / Dimension="0.063\" L x 0.031\" W (1.60mm x 0.80mm)", Supplier 1=DigiKey, Thickness (Max)="0.035\" (0.90mm)"
C514: library part CL10B223KB8NNNC, "CAP CER 0.022UF 50V X7R 0603", Device Package="0603 (1608 Metric)", Manufacturer="Samsung Electro-Mechanics", Operating Temperature="-55°C ~ 125°C", Supplier Part Number 1=1276-1104-1-ND, Temperature Coefficient=X7R, Tolerance=±10%, Voltage - Rated=50V, Applications="General Purpose", Capacitance="0.022 µF", ComponentLink1Description=Datasheet, ComponentLink1URL=http://www.samsungsem.com/kr/support/product-search/mlcc/CL10B223KB8NNNC.jsp, ComponentLink2Description="DigiKey Link", ComponentLink2URL=https://www.digikey.com/en/products/detail/samsung-electro-mechanics/CL10B223KB8NNNC/3886762, LastUpdated="09.02.2024 20:10:20", Lifecycle Status=Active, Minimum Order=1, Mounting Type="Surface Mount, MLCC", Package / Case="0603 (1608 Metric)", Packaging=TapeAndReel, Part Number=CL10B223KB8NNNC, Part Status=Active, PartId=9905, Price=0.01, Series=CL, Size / Dimension="0.063\" L x 0.031\" W (1.60mm x 0.80mm)", Supplier 1=DigiKey, Thickness (Max)="0.035\" (0.90mm)"
C516: library part CL10A225KQ8NNNC, "CAP CER 2.2UF 6.3V X5R 0603", Device Package="0603 (1608 Metric)", Manufacturer="Samsung Electro-Mechanics", Operating Temperature="-55°C ~ 85°C", Supplier Part Number 1=1276-1183-1-ND, Temperature Coefficient=X5R, Tolerance=±10%, Voltage - Rated=6.3V, Applications="General Purpose", Capacitance="2.2 µF", ComponentLink1Description=Datasheet, ComponentLink1URL=http://www.samsungsem.com/kr/support/product-search/mlcc/CL10A225KQ8NNNC.jsp, ComponentLink2Description="DigiKey Link", ComponentLink2URL=https://www.digikey.com/en/products/detail/samsung-electro-mechanics/CL10A225KQ8NNNC/3886841, LastUpdated="09.02.2024 20:10:16", Lifecycle Status=Active, Minimum Order=1, Mounting Type="Surface Mount, MLCC", Package / Case="0603 (1608 Metric)", Packaging=TapeAndReel, Part Number=CL10A225KQ8NNNC, Part Status=Active, PartId=13106, Price=0.01, Series=CL, Size / Dimension="0.063\" L x 0.031\" W (1.60mm x 0.80mm)", Supplier 1=DigiKey, Thickness (Max)="0.035\" (0.90mm)"
D200 D400: library part "LY L29K-H1K2-26-Z", "LED YELLOW DIFFUSED 0603 SMD", Current - Test=2mA, Device Package="0603 (1608 Metric)", Lens Color=White, Manufacturer="OSRAM Opto Semiconductors Inc.", Millicandela Rating=7mcd, Supplier Device Package=0603, Supplier Part Number 1=475-1196-1-ND, Voltage - Forward (Vf) (Typ)=1.8V, Color=Yellow, ComponentLink1Description=Datasheet, ComponentLink1URL=https://dammedia.osram.info/media/resource/hires/osram-dam-2492957/LY%20L29K.pdf, ComponentLink2Description="DigiKey Link", ComponentLink2URL=https://www.digikey.com/en/products/detail/osram-opto-semiconductors-inc/LY-L29K-H1K2-26-Z/810340, Configuration=Standard, Height (Max)=0.65mm, LastUpdated="03.06.2024 20:01:09", Lens Size="1.30mm x 0.80mm", Lens Style="Rectangle with Flat Top", Lens Transparency=Diffused, Lifecycle Status=Active, Minimum Order=1, Mounting Type="Surface Mount", Package / Case="0603 (1608 Metric)", Packaging=TapeAndReel, Part Number="LY L29K-H1K2-26-Z", Part Status=Active, PartId=140, Price=0.07, Series="SMARTLED® 0603", Size / Dimension="1.70mm L x 0.80mm W", Supplier 1=DigiKey, Viewing Angle=160°, Wavelength - Dominant=587nm, Wavelength - Peak=591nm
FB200: library part GZ1608D121TF, "FERRITE BEAD 120 OHM 0603 1LN", Current Rating (Max)=300mA, DC Resistance (DCR) (Max)=200mOhm, Device Package="0603 (1608 Metric)", Manufacturer="Shenzhen Sunlord Electronics Co., Ltd.", Operating Temperature="-55°C ~ 125°C", Supplier Part Number 1=3442-GZ1608D121TFCT-ND, ComponentLink1Description=Datasheet, ComponentLink1URL=https://www.sunlordinc.com/Download.aspx?file=L1VwbG9hZEZpbGVzL1BERl9DYXQvMjAxOTA0MDgxMzU0MTk3NjMucGRm&lan=en, ComponentLink2Description="DigiKey Link", ComponentLink2URL=https://www.digikey.com/en/products/detail/shenzhen-sunlord-electronics-co-ltd/GZ1608D121TF/14120576, Filter Type="Signal Line", Height (Max)="0.037\" (0.95mm)", Impedance @ Frequency="120 Ohms @ 100 MHz", LastUpdated="03.06.2024 19:51:45", Lifecycle Status=Active, Minimum Order=1, Mounting Type="Surface Mount", Number of Lines=1, Package / Case="0603 (1608 Metric)", Packaging=TapeAndReel, Part Number=GZ1608D121TF, Part Status=Active, PartId=2588, Price=0.01, Series=GZ, Size / Dimension="0.063\" L x 0.031\" W (1.60mm x 0.80mm)", Supplier 1=DigiKey
IC200: "IC MCU 32BIT 128KB FLASH 48LQFP", Device Package=48-LQFP, Manufacturer=STMicroelectronics, Operating Temperature="-40°C ~ 85°C (TA)", Supplier Part Number 1=497-6288-ND, Voltage - Supply (Vcc/Vdd)="2V ~ 3.6V", ComponentLink1Description=Datasheet, ComponentLink1URL=https://www.st.com/resource/en/datasheet/stm32f103cb.pdf, ComponentLink2Description="DigiKey Link", ComponentLink2URL=http://digikey.com/product-detail/en/stmicroelectronics/STM32F103CBT6/497-6288-ND/1754420, Connectivity="CANbus, I²C, IrDA, LINbus, SPI, UART/USART, USB", Core Processor="ARM® Cortex®-M3", Core Size=32-Bit, Data Converters="A/D 10x12b", LastUpdated="24.05.2020 22:49:18", Lifecycle Status=Active, Minimum Order=1, Mounting Type="Surface Mount", Number of I/O=37, Oscillator Type=Internal, Package / Case=48-LQFP, Packaging=Tray, Part Number=STM32F103CBT6, Part Status=Active, PartId=194, Peripherals="DMA, Motor Control PWM, PDR, POR, PVD, PWM, Temp Sensor, WDT", Price=5.25, Program Memory Size="128KB (128K x 8)", Program Memory Type=FLASH, RAM Size="20K x 8", Series=STM32F1, Speed=72MHz, Supplier 1=DigiKey
IC300: "IC REG LINEAR 3.3V 800MA SOT223", Current - Output=800mA, Current - Quiescent (Iq)="10 mA", Manufacturer=STMicroelectronics, Operating Temperature="0°C ~ 125°C", Package / Case="TO-261-4, TO-261AA", Supplier Device Package=SOT-223, Supplier Part Number 1=497-1242-1-ND, Voltage - Input (Max)=15V, Voltage - Output (Min/Fixed)=3.3V, Voltage Dropout (Max)="1.2V @ 800mA", ComponentLink1Description=Datasheet, ComponentLink1URL=http://www.st.com/content/ccc/resource/technical/document/datasheet/99/3b/7d/91/91/51/4b/be/CD00000544.pdf/files/CD00000544.pdf/jcr:content/translations/en.CD00000544.pdf, ComponentLink2Description="DigiKey Link", ComponentLink2URL=https://www.digikey.com/en/products/detail/stmicroelectronics/LD1117S33TR/585766, LastUpdated="03.06.2024 20:14:20", Lifecycle Status=Active, Minimum Order=1, Mounting Type="Surface Mount", Number of Regulators=1, Output Configuration=Positive, Output Type=Fixed, Packaging=TapeAndReel, Part Number=LD1117S33TR, Part Status=Active, Price=0.13, Protection Features="Over Current, Over Temperature", PSRR="75dB (120Hz)", Series=-, Supplier 1=DigiKey
IC500: "IC MTR DRV 4.75-28V QFN28", Current - Output=2A, Manufacturer="Trinamic Motion Control GmbH", Operating Temperature="-40°C ~ 125°C (TJ)", Package / Case="28-VFQFN Exposed Pad", Supplier Device Package="28-QFN (5x5)", Supplier Part Number 1=1460-1398-1-ND, Voltage - Load="5.5V ~ 29V", Voltage - Supply="4.8V ~ 5.25V", Applications="Automation Control", ComponentLink1Description=Datasheet, ComponentLink1URL=https://www.trinamic.com/fileadmin/assets/Products/ICs_Documents/TMC2209_Datasheet_V103.pdf, ComponentLink2Description="DigiKey Link", ComponentLink2URL=https://www.digikey.com/en/products/detail/trinamic-motion-control-gmbh/TMC2209-LA-T/10232491, Function="Driver - Fully Integrated, Control and Power Stage", Interface="Step/Direction, UART", LastUpdated="01.10.2022 11:24:54", Lifecycle Status=Active, Minimum Order=1, Motor Type - Stepper=Bipolar, Mounting Type="Surface Mount", Output Configuration=Step/Direction, Packaging=TapeAndReel, Part Number=TMC2209-LA-T, Part Status=Active, PartId=13, Price=1.91, Series=stallGuard™, Step Resolution="1 ~ 1/256", Supplier 1=DigiKey, Technology="Power MOSFET"
J200: "CONN RCPT USB2.0 MICRO B SMD R/A", Current Rating (Amps)="1.8A per Contact", Manufacturer="Amphenol ICC (FCI)", Operating Temperature="-30°C ~ 80°C", Supplier Part Number 1=609-4616-2-ND, Voltage - Rated=100VAC, ComponentLink1Description=Datasheet, ComponentLink1URL=https://cdn.amphenol-icc.com/media/wysiwyg/files/documentation/datasheet/inputoutput/io_usb_micro.pdf, ComponentLink2Description="DigiKey Link", ComponentLink2URL=//digikey.com/product-detail/en/amphenol-icc-fci/10118193-0001LF/609-4616-2-ND/2785388, Connector Type="USB - micro B", Features="Solder Retention", Gender=Receptacle, LastUpdated="09.12.2019 20:51:28", Lifecycle Status=0, Mating Cycles=10000, Minimum Order=1, Mounting Feature=Horizontal, Mounting Type="Surface Mount, Right Angle; Through Hole", Number of Contacts=5, Number of Ports=1, Packaging=TapeAndReel, Part Number=10118193-0001LF, Part Status=Active, Price=0.21, Series=-, Shielding=Shielded, Specifications="USB 2.0", Supplier 1=DigiKey, Termination=Solder
J201 J400: "CONN HEADER R/A 4POS 2.54MM", Current Rating (Amps)="3A per Contact", Insulation Color=Black, Manufacturer="Harwin Inc.", Material Flammability Rating="UL94 V-0", Operating Temperature="-40°C ~ 105°C", Supplier Part Number 1=952-3286-ND, ComponentLink1Description=Datasheet, ComponentLink1URL=https://cdn.harwin.com/pdfs/Harwin_PC_Connectors_M20.pdf, ComponentLink2Description="DigiKey Link", ComponentLink2URL=https://www.digikey.com/en/products/detail/harwin-inc/M20-9960445/3921052, Connector Type="Header, Cuttable", Contact Finish - Mating=Gold, Contact Length - Mating="0.240\" (6.10mm)", Contact Length - Post="0.118\" (3.00mm)", Contact Material=Brass, Contact Shape=Square, Contact Type="Male Pin", Fastening Type=Push-Pull, Insulation Height="0.100\" (2.54mm)", Insulation Material="Polyamide (PA6T), Nylon 6T", LastUpdated="21.09.2022 19:23:20", Lifecycle Status=Active, Minimum Order=1, Mounting Type="Through Hole, Right Angle", Number of Positions=4, Number of Positions Loaded=All, Number of Rows=1, Packaging=Bulk, Part Number=M20-9960445, Part Status=Active, PartId=167, Pitch - Mating="0.100\" (2.54mm)", Price=0.11, Row Spacing - Mating="-40°C ~ 105°C", Series=M20, Shrouding=Unshrouded, Style="Board to Board or Cable", Supplier 1=DigiKey, Termination=Solder
J300: "CONN PWR JACK 2X5.5MM SOLDER", Current Rating (Amps)=5A, Manufacturer="CUI Devices", Material Flammability Rating="UL94 V-0", Supplier Part Number 1=CP-102AH-ND, Voltage - Rated=24VDC, Actual Diameter="0.079\" (2.00mm ID), 0.256\" (6.50mm OD)", ComponentLink1Description=Datasheet, ComponentLink1URL=https://www.cuidevices.com/product/resource/digikeypdf/pj-102ah.pdf, ComponentLink2Description="DigiKey Link", ComponentLink2URL=//digikey.com/product-detail/en/cui-devices/PJ-102AH/CP-102AH-ND/408448, Connector Type=Jack, Gender=Male, Industry Recognized Mating Diameter="2.00mm ID (0.079\"), 5.50mm OD (0.217\")", Internal Switch(s)="Single Switch, Normally Closed", LastUpdated="16.12.2019 19:01:27", Lifecycle Status=0, Mating Length/Depth="0.354\" (9.00mm)", Minimum Order=1, Mounting Type="Through Hole, Right Angle", Number of Positions/Contacts="2 Conductors, 3 Contacts", Packaging=Tray, Part Number=PJ-102AH, Part Status=Active, Price=0.76, Series=-, Shielding=Unshielded, Supplier 1=DigiKey, Termination=Solder
J500: "CONN HEADER VERT 6POS 2.5MM", Current Rating (Amps)=3A, Insulation Color=Natural, Manufacturer="JST Sales America Inc.", Material Flammability Rating="UL94 V-0", Operating Temperature="-25°C ~ 85°C", Supplier Part Number 1=455-2271-ND, Voltage Rating=250V, ComponentLink1Description=Datasheet, ComponentLink1URL=http://www.jst-mfg.com/product/pdf/eng/eXH.pdf, ComponentLink2Description="DigiKey Link", ComponentLink2URL=http://digikey.com/product-detail/en/jst-sales-america-inc/B6B-XH-A-LF-SN/455-2271-ND/1000381, Connector Type=Header, Contact Finish - Mating=Tin, Contact Finish - Post=Tin, Contact Length - Post="0.134\" (3.40mm)", Contact Material=Brass, Contact Shape=Square, Contact Type="Male Pin", Fastening Type="Detent Lock", Insulation Height="0.276\" (7.00mm)", Insulation Material="Polyamide (PA66), Nylon 6/6", LastUpdated="12.01.2020 23:46:58", Lifecycle Status=Active, Minimum Order=1, Mounting Type="Through Hole", Number of Positions=6, Number of Positions Loaded=All, Number of Rows=1, Packaging=Bulk, Part Number=B6B-XH-A(LF)(SN), Part Status=Active, PartId=71, Pitch - Mating="0.098\" (2.50mm)", Price=0.27, Series=XH, Shrouding="Shrouded - 4 Wall", Style="Board to Cable/Wire", Supplier 1=DigiKey, Termination="Press-Fit, Solder"
L300: "4A 5A 6.8uH 70mΩ ±20% SMD,7.1x6.6mm Inductors (SMD) ROHS", Current - Saturation (Isat)=5A, Current Rating=4A, DC Resistance (DCR)=70mΩ, Inductance=6.8μH, Manufacturer=TECHFUSE, Package=SMD,7.1x6.6mm, Tolerance=±20%
R200: library part ERJ-3GEYJ152V, "RES SMD 1.5K OHM 5% 1/10W 0603", Device Package="0603 (1608 Metric)", Manufacturer="Panasonic Electronic Components", Operating Temperature="-55°C ~ 155°C", Power (Watts)="0.1W, 1/10W", Ratings=AEC-Q200, Supplier Device Package=0603, Supplier Part Number 1=P1.5KGCT-ND, Temperature Coefficient=±200ppm/°C, Tolerance=±5%, ComponentLink1Description=Datasheet, ComponentLink1URL=http://industrial.panasonic.com/www-cgi/jvcr13pz.cgi?E+PZ+3+AOA0001+ERJ3GEYJ152V+7+WW, ComponentLink2Description="DigiKey Link", ComponentLink2URL=https://www.digikey.com/en/products/detail/panasonic-electronic-components/ERJ-3GEYJ152V/104381, Composition="Thick Film", Features="Automotive AEC-Q200", Height - Seated (Max)="0.022\" (0.55mm)", LastUpdated="09.02.2024 20:42:41", Lifecycle Status=Active, Minimum Order=1, Number of Terminations=2, Package / Case="0603 (1608 Metric)", Packaging=TapeAndReel, Part Number=ERJ-3GEYJ152V, Part Status=Active, PartId=19210, Price=0.01, Resistance="1.5 kOhms", Series=ERJ-3G, Size / Dimension="0.063\" L x 0.031\" W (1.60mm x 0.80mm)", Supplier 1=DigiKey
R201 R400 R401 R402 R403 R404: library part ERJ-P03F1002V, "RES SMD 10 KOHM 1% 1/5W 0603", Device Package="0603 (1608 Metric)", Manufacturer="Panasonic Electronic Components", Operating Temperature="-55°C ~ 155°C", Power (Watts)="0.2W, 1/5W", Ratings=AEC-Q200, Supplier Device Package=0603, Supplier Part Number 1=10-ERJ-P03F1002VCT-ND, Temperature Coefficient=±200ppm/°C, Tolerance=±1%, ComponentLink1Description=Datasheet, ComponentLink1URL=https://industrial.panasonic.com/cdbs/www-data/pdf/RDO0000/AOA0000C331.pdf, ComponentLink2Description="DigiKey Link", ComponentLink2URL=https://www.digikey.com/en/products/detail/panasonic-electronic-components/ERJ-P03F1002V/9810215, Composition="Thick Film", Features="Automotive AEC-Q200, Pulse Withstanding", Height - Seated (Max)="0.022\" (0.55mm)", LastUpdated="09.02.2024 20:40:33", Lifecycle Status=Active, Minimum Order=1, Number of Terminations=2, Package / Case="0603 (1608 Metric)", Packaging=TapeAndReel, Part Number=ERJ-P03F1002V, PartId=82212, Price=0.03, Resistance="10 kOhms", Series=ERJ-P03, Size / Dimension="0.063\" L x 0.031\" W (1.60mm x 0.80mm)", Supplier 1=DigiKey